# EAGLE board Cap-Gold (EAGLE 3.55)

No outline drawn. Coordinates in mm, seen from the top.
Copper layers used: 

## Footprints (pad centres in the part's own frame; a part is rotated, then mirrored left to right if it is on the bottom)
C-G-1 = drill 0.813 pad 1.397 round:  -2.54,0 | drill 0.813 pad 1.397 octagon:  2.54,0
C-G-2 = drill 0.813 pad 1.397 round:  -2.54,0 | drill 0.813 pad 1.397 octagon:  2.54,0

## Placement (x,y rotation side)
PAC-G-1  [C-G-1]  17.78,240.03 0 top
PAC-G-2  [C-G-2]  39.37,240.03 0 top
TQFP1  [-35SC]  0,0 0 top

## Library data of the parts
PAC-G-1 PAC-G-2 = cap-gold
TQFP1 = BLATT